# Altium PCB Rackmount_DSP.PcbDoc (part 9 of 24)
Units mil, origin at the board's own origin, x right, y up, seen from the top; angles counter-clockwise.
Board outline 10629.92 x 8267.72 mil, 4 copper layers (Top Layer, Mid Layer 1, Mid Layer 2, Bottom Layer), stack 36.2 mil thick; 4500 components, 1565 nets, 9765 pads, 3289 vias.
Unrouted connection lines stored in the file: 1.
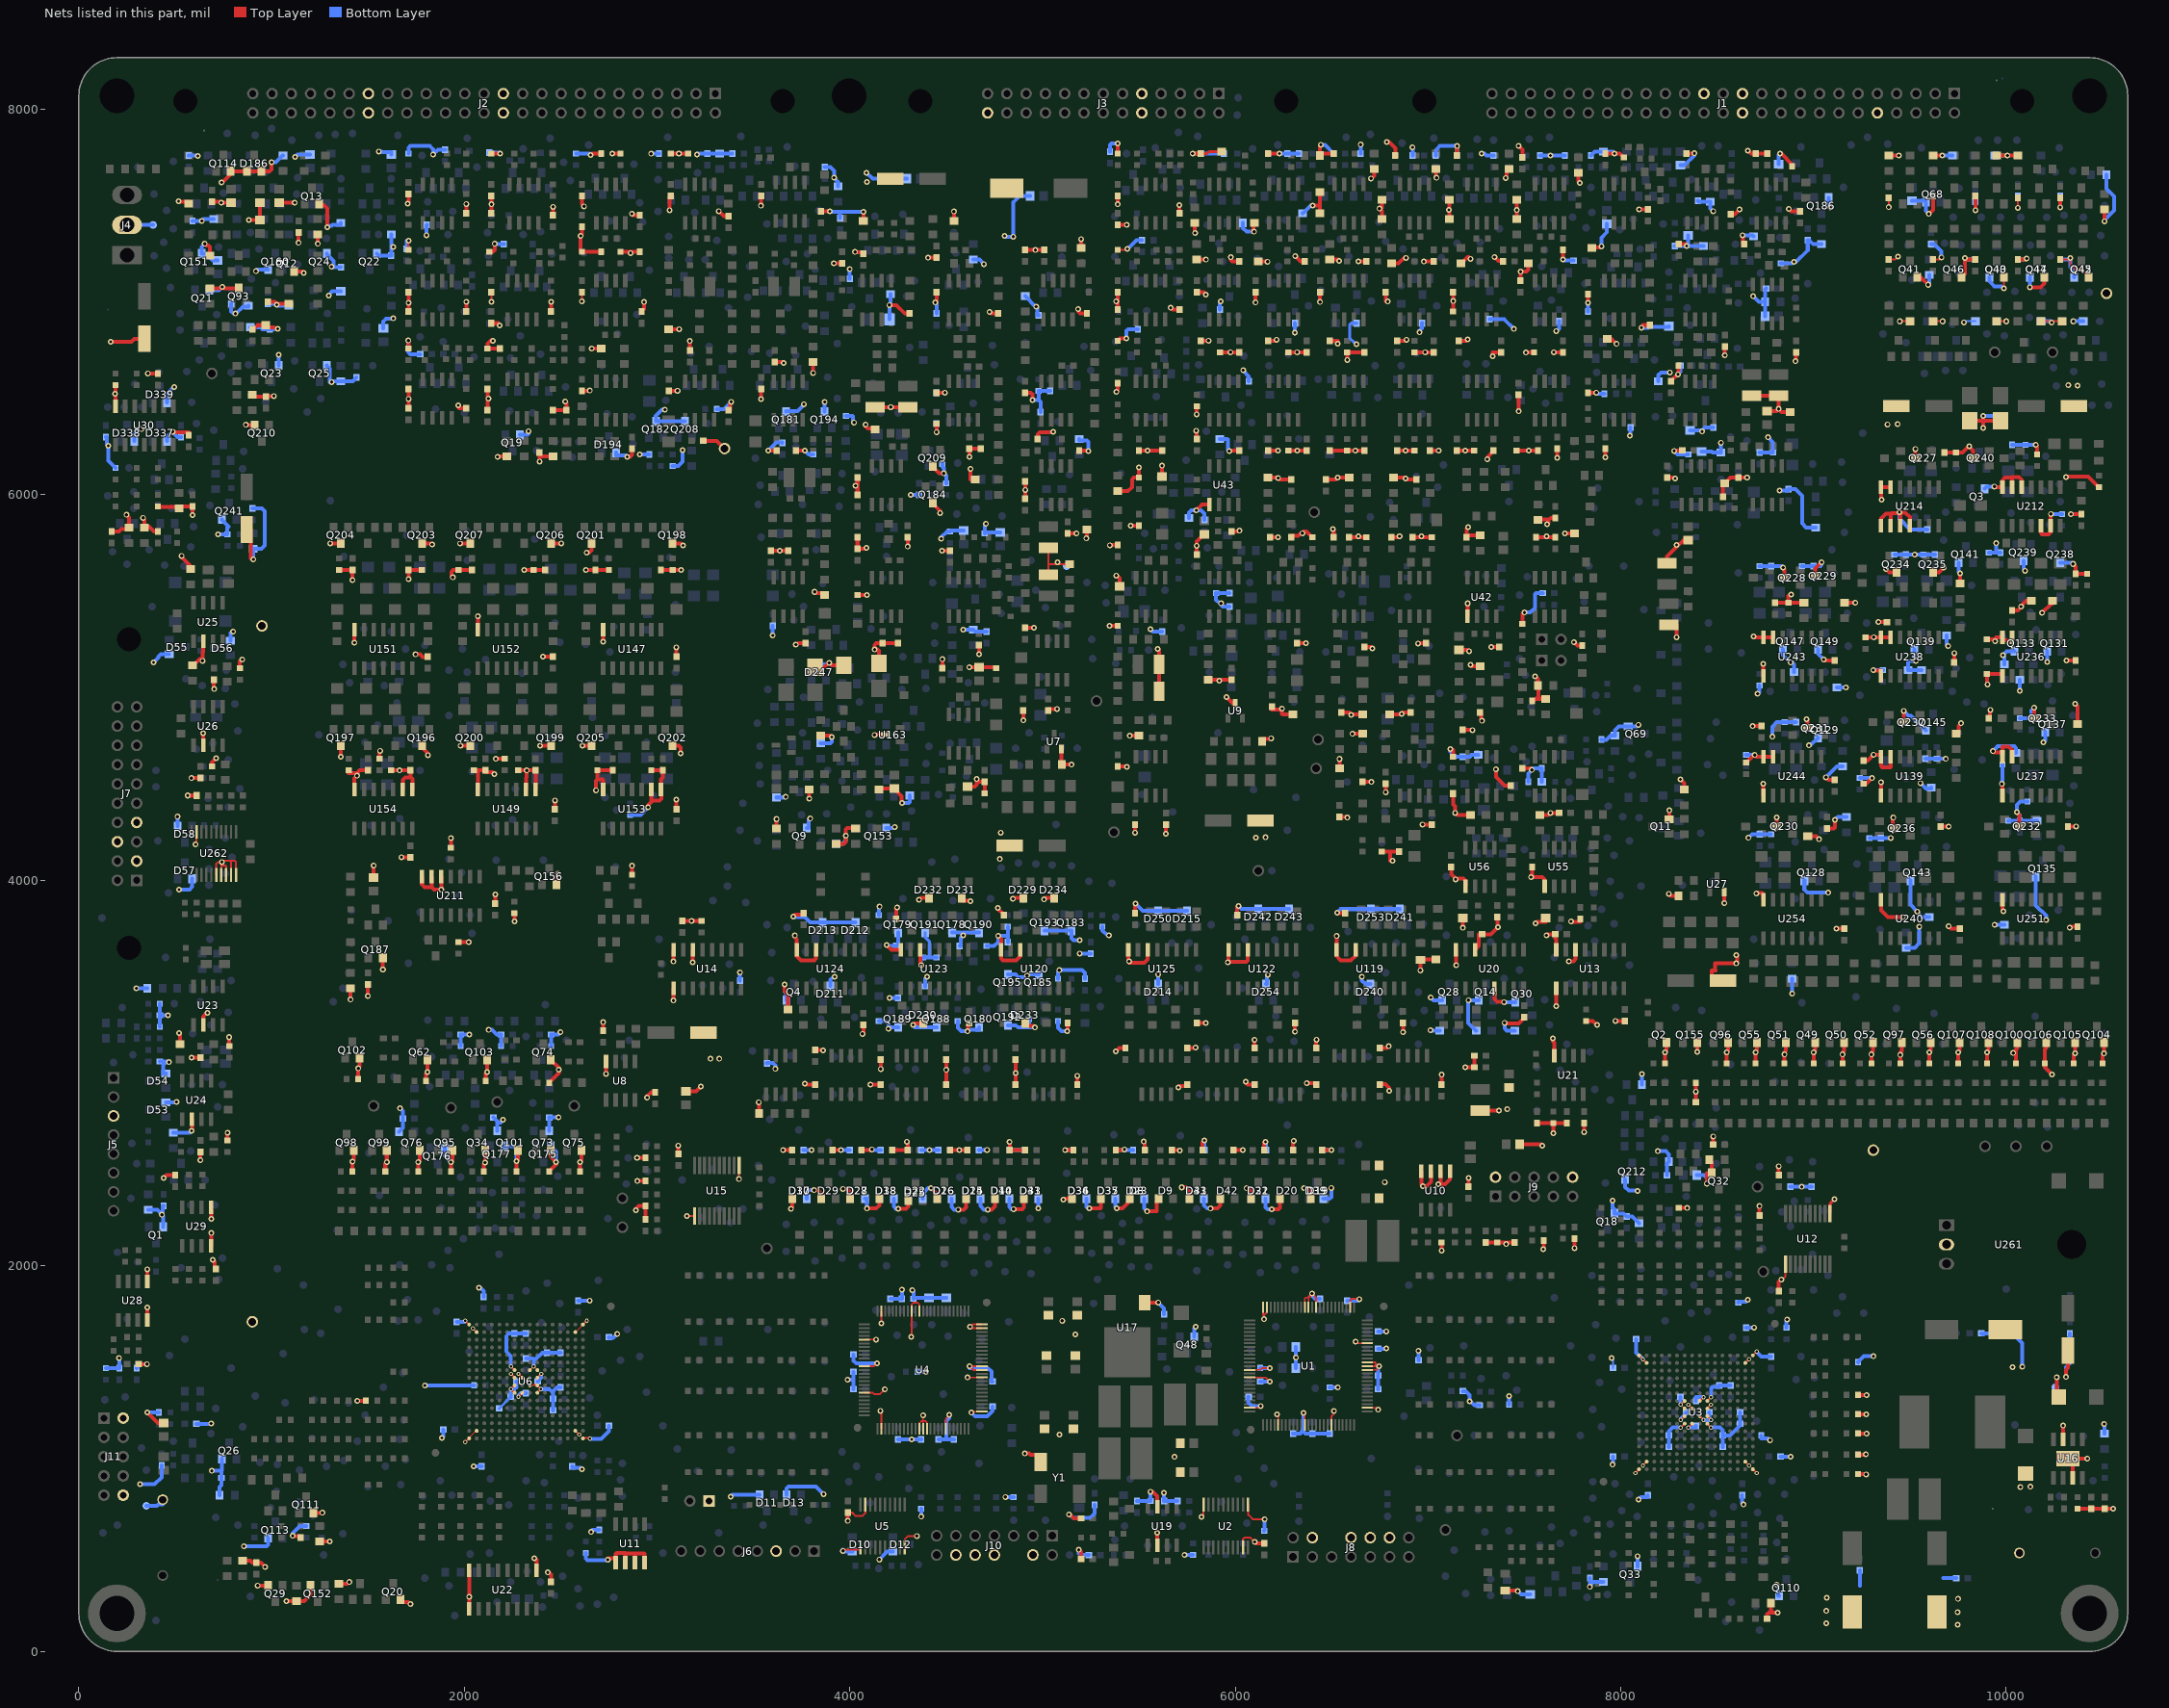
[diagram p11: the nets of this part, all layers, seen from the top]

## Via types
v1: diameter 30, hole 16, Top Layer to Bottom Layer, 3143 vias
v2: diameter 22, hole 12, Top Layer to Bottom Layer, 146 vias

## Nets (pads, with @x,y where several pads share a name; then routed paths per layer and width w, separated by ;. In a path a pad name is that pad's centre, name@x,y a point inside that pad or via, vN(x,y) a via of type N, cw(c..) or ccw(c..) an arc to the next point about the centre after c; other vN are vias at no path point) (continued)
GND: (continued)
  Top Layer w20: v1(164.54,6793.63) 272.37,6793.63 288.5,6809.76 C942.2@340,6809.76 ; C426.2@170,5810 207.55,5810 221.11,5823.56 251.06,5823.56 257.5,5830 R1487.1@260,5830 260,5882.86 v1(246.46,5896.4) ; U30.7@190,6460 190,6521.02 v1(187.09,6523.93) 190,6526.84 R1494.2@190,6570 ; C517.2@310,1490 v1(353.36,1490) ; v1(333.49,5880.9) 333.49,5876.51 340,5870 R1486.1@340,5834.56 ; R1486.1@340,5830 R1486.1@340,5834.56 ; v1(354.46,1982.26) 355,1981.71 U28.5@355,1920 ; U28.4@355,1720 v1(355,1783.67) ; v1(355.17,1240) 410.17,1185 C334.2@440,1185 ; v1(358.5,6630) C434.2@410,6630 ; C425.2@410,5810 390.57,5810 366,5834.56 R1486.1@340,5834.56 ; R1492.2@410,5940 410,5936.62 520,5936.62 R1485.1@520,5930 530,5940 C424.2@590,5940 v1(590,5894.64) ; v1(440.4,2456.37) 454.04,2470 C282.2@500,2470 ; v1(486.91,6328.02) 486.91,6324.8 570,6324.8 C290.2@570,6310 ; v1(517.66,7523.8) 521.47,7520 570,7520 R2225.1@570,7510 ; v1(520,3208.03) 525,3203.03 R2717.2@525,3150 ; v1(533.13,5683.32) 533.13,5677.09 580,5630.22 R2718.2@580,5615 ; v1(565.53,4440) C242.2@610,4440 ; v1(583.9,4530) C224.2@630,4530 ; v1(584.26,3080) C1175.1@630,3080 ; v1(584.64,2699.94) 584.64,2703.02 586.63,2705 U24.2@586.63,2760 ; R2716.2@590,5115 592.5,5115 626.64,5149.14 631.06,5149.14 v1(641.38,5138.82) 641.38,5181.38 645,5185 U25.2@645,5240 ; C1174.2@630,2590 630,2552.39 630.89,2551.5 v1(630.89,2547.47) ; U23.2@645,3250 645,3293.49 662.86,3311.35 667.36,3311.35 v1(667.36,3312.08) ; U26.2@645,4700 v1(645,4763.29) ; v1(652.97,7302.55) 661.26,7294.26 672.55,7294.26 680,7286.81 R1643.2@680,7240 ; R1100.1@680,7070 734.69,7070 v1(743.76,7079.07) 751.33,7071.5 Q93.3@830,7071.5 ; U29.4@686.63,2104.11 v1(686.63,2169.95) ; v1(686.63,2242.8) U29.5@686.63,2304.11 ; R2723.2@690,4590 690,4611.62 v1(712.42,4634.03) ; C1031.2@690,7520 733.5,7520 v1(738.5,7515) C825.2@790,7515 ; v1(694.99,2031.58) 704.96,2021.61 704.96,1984.11 C518.2@711.63,1984.11 ; C241.2@700,5040 700,4992.21 v1(701.78,4992.21) ; v1(740.44,7620.7) 745.28,7620.7 787.5,7662.92 Q114.2@787.5,7678.5 D186.1@872.5,7678.5 D186.2@947.5,7678.5 989.6,7678.5 1000.21,7689.11 v1(1000.21,7724.96) ; R2721.2@770,2650 770,2689.35 v1(770.94,2690.3) ; R2722.2@780,3140 v1(780,3186.26) ; R2724.2@835,5100 835,5135 845.84,5145.84 v1(847.95,5145.84) ; R1359.1@850,470 889.48,470 899.48,460 C377.1@920,460 943.94,460 v1(965.71,438.23) ; v1(865.79,6363.32) 863.98,6361.5 Q210.2@912.5,6361.5 ; C1111.2@870,5819.76 891.74,5819.76 891.74,5669.33 900.98,5669.33 v1(905.6,5664.72) ; v1(881.97,7425) C824.2@940,7425 C816.2@940,7515 ; R2651.2@900,6520 910,6510 C1158.1@970,6510 970,6510.7 1006,6510.7 1007.74,6512.44 v1(1011.36,6512.44) ; C1157.2@900,6860 907.5,6860 927.5,6880 R2652.1@970,6880 970,6870 1012.5,6870 1021.83,6860.67 v1(1031.15,6860.67) ; v1(927.67,341.5) Q29.2@982.5,341.5 ; C416.1@980,7000 1016,7000 1026.22,6989.78 v1(1026.22,6986.4) 1029.82,6990 R1372.1@1090,6990 ; C823.2@1040,7515 v1(1120.12,7515) ; v1(1076.15,260) R2222.1@1130,260 1169.07,260 1202.5,293.43 Q152.2@1202.5,341.5 ; v1(1108.88,599.32) 1110.7,597.5 1150,597.5 C896.2@1150,590 ; Q12.2@1117.5,7158.5 1160.24,7158.5 v1(1167.2,7151.53) ; v1(1140,7307.27) C417.1@1140,7360 ; Q111.2@1217.5,718.5 1262.55,718.5 v1(1263.17,719.12) ; v1(1240,7302.34) R1373.1@1240,7350 ; Q13.2@1247.5,7508.5 1247.5,7503.36 1271.55,7503.36 1288.76,7486.15 v1(1288.76,7387.58) ; R2037.2@1250,570 v1(1301,570) ; v1(1304.71,5748.5) Q204.3@1360,5748.5 ; R1279.2@1350,350 1392.5,350 1401.78,359.28 v1(1402.72,359.28) ; R2529.2@1350,5610 C1129.1@1420,5610 v1(1420,5558.32) ; v1(1359,4640.86) 1360,4641.86 Q197.3@1360,4698.5 ; R2535.2@1400,4570 1400,4556.28 v1@1443.07,4556.28 ; v1(1410,3381.56) R2554.2@1410,3440 ; R1969.1@1420,2490 v1(1420,2541.21) 1427.5,2548.71 Q98.2@1427.5,2598.5 ; U154.7@1430,4470 1430,4529.36 v1(1443.07,4542.42) v1@1443.07,4556.28 ; v1(1430,5232.84) U151.7@1430,5300 ; v1(1445.09,1300) R2522.1@1490,1300 ; R1968.1@1450,2970 v1(1450,3024.35) 1457.5,3031.85 Q102.2@1457.5,3078.5 ; v1(1500,3399.99) C1119.1@1500,3460 ; C1121.1@1500,4570 1456.79,4570 v1@1443.07,4556.28 ; C1137.2@1530,4015 v1(1530,4077.32) ; R2646.2@1560,4630 1560,4669 v1(1562.82,4671.82) ; v1(1577.5,3536.96) Q187.2@1577.5,3598.5 ; R1967.1@1590,2490 1590,2530.74 v1(1597.66,2538.41) 1597.5,2538.57 Q99.2@1597.5,2598.5 ; R2536.2@1620,4570 v1(1663.22,4570) C1122.1@1720,4570 1720,4532.5 ; Q20.2@1667.5,268.5 1667.5,255 1707.5,255 1716.29,246.21 v1(1719.96,246.21) ; v1(1673.36,4120) C1015.2@1720,4120 ; U154.2@1680,4470 1680,4520.06 1692.44,4532.5 1720,4532.5 ; v1(1705.63,7511.08) 1710,7515.44 C992.2@1710,7560 ; v1(1709.47,6800.28) 1710,6799.75 R816.2@1710,6760 ; v1(1710,5562.46) C1128.1@1710,5610 R2528.2@1780,5610 ; C365.1@1710,6450 v1(1710,6497.65) C606.2@1710,6550 ; C366.1@1710,6950 v1(1710,6995.48) C557.2@1710,7050 ; U154.1@1730,4470 1730,4525 1722.5,4532.5 1720,4532.5 ; v1(1747.19,5172.03) 1770.28,5172.03 1784.3,5158.01 1810,5158.01 C1012.2@1810,5160 ; R654.1@1760,2490 v1(1760,2537.71) 1767.5,2545.21 Q76.2@1767.5,2598.5 ; U211.7@1780,4020 1779.8,4020 1779.8,3978.95 1793.75,3965 1830,3965 ; Q196.3@1780,4698.5 1780,4688.3 1810.79,4657.51 v1(1810.79,4649.59) ; Q203.3@1780,5748.5 1826.03,5748.5 v1(1832.75,5741.78) ; R650.1@1800,2960 1800,2996.67 v1(1807.91,3004.58) 1807.5,3004.98 Q62.2@1807.5,3068.5 ; U211.6@1830,4020 1830,3965 ; U211.5@1880,4020 v1(1880,3952.01) 1844.49,3952.01 1831.5,3965 1830,3965 ; R1966.1@1930,2490 v1(1930,2538.41) 1937.5,2545.91 Q95.2@1937.5,2598.5 ; R2510.2@1930,4170 v1(1930,4218.45) ; v1(1939.88,5571.66) 1933.16,5571.66 1933.16,5601.26 1941.89,5610 R2532.2@1970,5610 C1132.1@2040,5610 ; v1(1968.48,6464.83) 1968.48,6455.52 1974,6450 C940.2@2010,6450 ; R2355.2@1970,3680 v1(2022.27,3680) ; v1(1977.43,5748.5) Q207.3@2030,5748.5 ; v1(1980.04,4698.5) Q200.3@2030,4698.5 ; C741.2@2010,6950 v1(2010,7000.97) ; C733.2@2010,7460 v1(2010,7508.92) ; U22.9@2025,220 v1(2025,282.57) U22.8@2025,420 ; R2525.2@2050,4570 C1125.1@2110,4570 C1125.1@2110,4569.93 ; U149.7@2070,4470 2070,4565.93 2074,4569.93 C1125.1@2110,4569.93 ; U152.7@2070,5300 v1(2070,5369.78) ; R653.1@2100,2490 2100,2528.44 v1(2107.17,2535.6) 2107.5,2535.94 Q34.2@2107.5,2598.5 ; R1964.1@2110,2960 2110,2997.98 v1(2117.5,3005.48) Q103.2@2117.5,3068.5 ; C371.1@2120,6440 2120,6494.85 v1(2124.56,6499.41) 2120,6503.97 C941.2@2120,6550 ; R845.2@2130,7260 2147.24,7260 2157.29,7270.05 v1(2157.29,7302.5) ; C372.1@2140,6890 2176,6890 2183.75,6882.25 v1(2183.75,6879.07) ; C373.1@2140,7460 v1(2140,7507.35) C974.2@2140,7550 ; R847.2@2140,7770 v1(2185,7770) ; v1(2147.95,6798.64) 2147.95,6801.07 2138.17,6801.07 2120,6782.9 R850.2@2120,6760 C1230.2@2185,6760 ; v1(2156.41,4550.68) 2146,4561.09 2110,4561.09 C1125.1@2110,4569.93 ; C1010.2@2160,3880 v1(2160,3926.24) ; v1(2162.65,4630) R2644.2@2210,4630 ; v1(2172.38,6197.39) 2168.83,6197.39 2171.82,6194.39 2177.43,6200 R1356.2@2220,6200 ; v1(2260,3786.27) R2356.2@2260,3830 ; R1965.1@2270,2490 v1(2270,2542.61) 2277.5,2550.11 Q101.2@2277.5,2598.5 ; R2524.2@2280,4570 v1(2324.2,4570) ; v1(2309.85,5610) R2531.2@2360,5610 C1131.1@2420,5610 ; U149.2@2320,4470 2320,4530.8 2324.2,4535 v1(2324.2,4570) ; v1(2363.4,483.38) 2366.62,483.38 2375,475 U22.1@2375,420 ; U149.1@2370,4470 C1124.1@2370,4570 v1(2324.2,4570) ; v1(2390,6173) 2390,6198.9 ; C357.1@2390,6220 2390,6198.9 ; v1(2392.39,4698.5) Q199.3@2450,4698.5 ; v1(2407.74,5160) C583.2@2460,5160 ; v1(2432.34,409.35) 2438.16,409.35 2450,397.5 C299.2@2450,360 ; R638.1@2440,2490 2474.9,2524.9 v1(2474.9,2538.58) 2447.5,2565.98 Q73.2@2447.5,2598.5 ; R651.1@2440,2950 2489.44,2999.44 v1(2489.44,3017) 2489.44,3026.56 Q74.2@2447.5,3068.5 ; Q206.3@2450,5748.5 v1(2503.09,5748.5) ; C558.2@2450,6950 v1(2450,7001.02) ; R1459.1@2460,6200 2391.1,6200 2390,6198.9 ; C556.2@2460,6440 C512.2@2530,6440 2530,6478.67 v1(2523.94,6484.72) ; C996.2@2460,7450 v1(2460,7494.09) ; C1112.2@2470,4370 v1(2470,4414.69) ; Q156.2@2477.5,3978.5 2477.5,4024.6 v1(2486.02,4033.12) ; R652.1@2600,2490 v1(2600,2537.71) 2607.5,2545.21 Q75.2@2607.5,2598.5 ; C561.2@2610,6540 2650.52,6540 v1(2651.17,6540.65) ; C369.1@2610,7390 2610,7348.79 v1(2603.8,7342.6) 2603.8,7260 R2341.2@2610,7260 C370.1@2710,7260 ; C744.2@2610,7550 2610,7507.81 v1(2620.98,7496.83) ; v1(2612.34,4698.5) Q205.3@2660,4698.5 ; v1(2630.98,5610) C1126.1@2680,5610 R2526.2@2750,5610 ; v1(2634.36,5699.72) 2646.79,5699.72 2660,5712.93 Q201.3@2660,5748.5 ; v1(2655.35,7762.98) 2662.36,7770 C363.1@2710,7770 ; v1(2661.09,6758.86) 2662.23,6760 R1743.2@2710,6760 ; v1(2683.5,4467.14) 2683.5,4516.23 2690,4522.73 ; C528.2@2720,3220 v1(2720,3263.96) ; U153.7@2720,4470 2720,4519.26 2716.54,4522.73 2690,4522.73 ; v1(2720,5237.99) U147.7@2720,5300 ; v1(2735,2996.43) U8.4@2735,3060 ; v1(2744.28,474.88) 2744.28,482.21 U11.1@2785,482.21 ; v1(2767.45,7770) R2337.2@2810,7770 ; C1130.1@2770,4570 R2530.2@2690,4570 2690,4522.73 ; U11.1@2785,460 U11.1@2785,482.21 ; R2338.2@2810,7260 v1@2861.91,7260 ; U11.2@2835,460 2835,508.38 ; v1(2844.37,6197.02) 2858.77,6197.02 2869.64,6207.89 2869.64,6240 C560.2@2870,6240 ; v1(2861.91,7254.56) v1@2861.91,7260 ; v1(2868.97,7457.89) 2868.97,7455.03 2874,7450 C737.2@2910,7450 ; R1946.2@2870,4030 v1(2870,4075.76) ; U11.3@2885,460 2885,507.65 ; v1(2889.46,2288.15) 2889.46,2295.46 2904,2310 C348.2@2940,2310 C347.2@2940,2240 ; v1(2896.17,2560) C345.2@2940,2560 ; v1(2897.06,2440) C346.2@2940,2440 ; C364.1@2910,7260 v1@2861.91,7260 ; C979.2@2920,6950 2932.5,6962.5 v1(2932.5,7000.01) ; U11.4@2935,460 2935,506.13 2933.48,507.65 2885,507.65 ; v1(2948.53,2872.63) 2948.53,2879.4 2969.14,2900 C728.2@2990,2900 ; v1(2953.2,4379.22) 2953.2,4387.56 2954.2,4388.55 2954.2,4391.62 2970,4407.42 2970,4413.31 ; U153.2@2970,4470 2970,4413.31 ; R2527.2@2970,4570 C1127.1@3030,4570 3030,4533.65 3020,4523.65 U153.1@3020,4470 3021.77,4470 3021.77,4423.24 3011.84,4413.31 2970,4413.31 ; C1123.1@3020,5610 R2523.2@3080,5610 v1(3124.37,5610) ; C976.2@3060,6540 v1(3105.97,6540) ; R1633.2@3060,6860 v1(3114.53,6860) ; v1(3064.35,7476.62) 3064.35,7550 C740.2@3070,7550 ; R2339.2@3070,7770 v1(3113.45,7770) R2336.2@3160,7770 ; Q202.3@3080,4698.5 3113.19,4698.5 3122.82,4688.87 v1(3122.82,4658.99) ; Q198.3@3080,5748.5 3122.9,5748.5 v1(3134.51,5736.89) ; v1(3085,3376.19) U14.9@3085,3440 ; v1(3085,3578.69) U14.8@3085,3640 ; C876.2@3100,4370 v1(3100,4419.13) ; C571.2@3100,5160 v1(3100,5208.72) ; C1082.2@3110,2580 v1(3110,2623.89) ; C305.2@3130,3790 v1(3178.75,3790) R858.1@3230,3790 ; C907.2@3150,2905 3201.86,2905 v1(3226.62,2929.76) ; C526.2@3170,6750 v1(3170,6797.76) ; v1(3185,3575.22) U14.6@3185,3640 ; C356.1@3240,6280 3310,6280 TP9.1@3350,6240 ; v1(3320.58,7471.67) 3347.25,7445 C975.2@3370,7445 ; C735.2@3370,6440 3378.57,6440 3378.57,6477.5 3383.97,6482.9 v1(3384.78,6482.9) ; v1(3527.66,2848.7) 3530,2846.36 R2509.1@3530,2790 ; v1(3538.27,7499.85) 3540,7501.58 C978.2@3540,7550 ; v1(3540,6497.3) C988.2@3540,6550 ; v1(3576.97,6230) C355.1@3620,6230 ; C747.2@3590,5710 v1(3637.38,5710) C542.2@3680,5710 ; C524.2@3610,6690 3650.52,6690 v1(3656.36,6684.17) ; R2507.1@3620,4270 v1(3620,4317.6) ; v1(3653.12,2600) C314.2@3700,2600 ; v1(3661.87,3460.26) 3661.87,3425.26 3680,3407.13 R1668.2@3680,3330 ; v1(3695,2295.93) 3702.5,2303.43 D30.1@3702.5,2348.5 ; v1(3706.5,3811.4) 3717.6,3822.5 3760,3822.5 C649.2@3760,3830 ; v1(3715.31,3713.72) 3715.31,3704.69 3725,3695 U124.8@3725,3640 3725,3607.66 3747.66,3585 3816.1,3585 3825,3593.9 U124.6@3825,3640 ; C967.2@3720,6230 v1(3766.09,6230) ; v1(3720.17,5222.5) 3726.5,5222.5 3734,5230 C1006.2@3770,5230 ; v1(3766.2,2945.38) 3771.58,2940 C645.2@3820,2940 ; v1(3790,4423.49) R1457.2@3790,4470 ; v1(3810,6632.56) R1631.2@3810,6690 ; v1(3815.09,2392.39) 3834.71,2392.39 3852.5,2374.6 D29.1@3852.5,2348.5 ; v1(3817.33,5496.41) 3823.74,5490 3870,5490 R1628.2@3870,5480 ; C642.2@3820,3120 3858.68,3120 v1(3861.07,3117.62) ; C917.1@3820,5105 3820,5098.17 3858.66,5098.17 3888.78,5128.29 v1(3892.89,5128.29) 3906.18,5115 C956.1@3970,5115 ; R1836.2@3850,4750 3899.99,4750 v1(3906.47,4743.52) ; C989.2@3850,7470 v1(3896.68,7470) ; C315.2@3910,2600 v1(3953.87,2600) ; v1(3917.57,7201.58) 3919.16,7200 C1052.2@3960,7200 ; R1290.2@3930,4190 3969.73,4190 3979.68,4199.95 v1(3979.68,4230.89) 3979.68,4263.91 3986.7,4270.93 4029.07,4270.93 R2220.1@4030,4270 ; v1(3964.89,2399.35) 3989.92,2399.35 4002.5,2386.76 D28.1@4002.5,2348.5 ; v1(3990,676.77) C246.2@3990,720 ; v1(4027.06,7260.06) 4029.62,7257.5 4070,7257.5 C736.2@4070,7250 ; v1(4029.93,6047.03) v1@4030.47,6047.03 ; R2374.1@4040,5480 v1(4088.19,5480) ; C1056.1@4040,5780 C1023.2@4040,5720 4081.38,5720 v1(4086.19,5724.81) ; C538.2@4040,6000 4040,6037.5 v1@4030.47,6047.03 ; C615.2@4040,6090 4040,6052.5 4034.53,6047.03 v1@4030.47,6047.03 ; C316.2@4060,2600 4110.53,2600 v1(4114.44,2603.91) ; v1(4065.41,3203.39) 4070,3207.98 C641.2@4070,3250 ; R1670.2@4070,7420 v1(4070,7467.71) ; v1(4082.28,6364.8) 4082.28,6355.24 4093.63,6343.89 4128.18,6343.89 4128.18,6340 R1099.1@4130,6340 ; v1(4089.05,2297.53) 4136.53,2297.53 4152.5,2313.5 D18.1@4152.5,2348.5 ; v1(4107.18,2940) C630.2@4160,2940 ; v1(4127.73,4754.17) 4128.55,4755 U163.3@4182.51,4755 ; C770.1@4130,6455 v1(4212.33,6455) C765.1@4300,6455 ; R962.1@4150,4470 4155,4475 C829.1@4230,4475 4269.37,4435.63 4269.37,4400.63 v1(4271.2,4400.63) ; R2089.2@4150,5125 4150,5190 4142.85,5197.15 v1(4128.51,5197.15) 4128.51,5221.47 4137.05,5230 C1055.1@4170,5230 C578.2@4250,5230 ; v1(4160,3021) C1036.2@4160,3070 ; v1(4191,3664.61) 4215.61,3640 U123.8@4265,3640 ; v1(4205,6984.82) 4242.05,6984.82 4286.87,6940 C987.2@4310,6940 ; C318.2@4220,2600 C323.1@4300,2600 4300,2640.31 v1(4296.11,2644.2) ; C644.2@4240,3800 4240,3852.81 4238.21,3854.6 4243.62,3860 4243.62,3859.4 v1(4244.87,3859.4) ; v1(4251.13,2296.07) 4289.89,2296.07 4302.5,2308.68 D25.1@4302.5,2338.5 ; v1(4300,5731.21) C614.2@4300,5780 ; v1(4328.14,3249.92) 4336.72,3258.5 D230.3@4380,3258.5 ; v1(4359.33,3899.93) 4361.43,3899.93 4370,3908.5 D232.3@4410,3908.5 ; U123.6@4365,3640 4365.62,3640 4365.62,3559.97 v1(4370.05,3559.97) ; v1(4405.91,7230) C1044.1@4450,7230 ; v1(4421.44,2403.75) 4419.95,2402.25 4452.5,2369.7 D16.1@4452.5,2348.5 ; Q184.3@4430,5958.5 4430,5955 4469.01,5915.99 v1(4469.01,5905.9) ; Q209.3@4430,6148.5 4430,6145 4464.14,6110.86 4487.15,6110.86 v1(4487.31,6111.02) ; v1(4442.78,6997.53) 4450,7004.75 C1032.2@4450,7050 ; v1(4450,6325.48) R2376.1@4450,6370 ; C980.2@4450,6530 v1(4492.83,6530) ; v1(4478.45,5710) C613.2@4520,5710 ; C1038.2@4480,5100 v1(4480,5147.14) ; C1021.2@4500,2940 v1(4500,3016.63) C1039.2@4500,3070 ; C322.1@4520,2600 v1(4567.51,2600) C320.1@4610,2600 ; R2305.1@4540,7420 v1(4540,7469.43) ; v1(4562.45,2292.04) 4590.84,2292.04 4602.5,2303.7 D24.1@4602.5,2348.5 ; D231.3@4580,3908.5 4580,3895 4622.35,3895 v1(4625.93,3891.42) ; C808.2@4610,4485 4648.15,4485 4658.51,4495.37 v1@4658.51,4515.49 ; v1(4610.23,3216.7) 4614,3220.46 4614,3260 C619.2@4620,3260 ; v1(4619.45,5105) C811.2@4670,5105 4753.25,5105 4758.25,5100 R1776.2@4760,5100 ; v1(4620,6197.47) C510.2@4620,6240 C1016.2@4680,6240 ; v1(4621.66,1479.63) v1@4626.66,1474.63 ; v1(4626.86,6134.69) 4626.86,6080 R1695.1@4650,6080 ; v1(4658.51,4525.04) v1@4658.51,4515.49 ; v1(4670,5173.15) C877.2@4670,5220 ; R1779.2@4700,4450 C970.2@4700,4510 4664,4510 v1@4658.51,4515.49 ; v1(4715.55,2292.04) 4735.01,2292.04 4752.5,2309.52 D14.1@4752.5,2348.5 ; v1(4724.35,6949.01) 4733.36,6940 C1022.2@4770,6940 ; v1(4768.69,3857.55) 4769.17,3857.07 4769.17,3852.33 4800,3821.5 C304.2@4800,3820 ; v1(4769.6,3711.63) 4769.6,3710.47 4785,3695.07 U120.8@4785,3640 4785,3593.44 4793.44,3585 4862.4,3585 4885,3607.6 U120.6@4885,3640 ; v1(4829.18,2643.29) 4830,2642.47 C326.1@4830,2600 C327.1@4910,2600 ; v1(4846.38,3903.77) 4851.1,3908.5 D229.3@4900,3908.5 ; v1(4849.6,2294.6) 4894.8,2294.6 4902.5,2302.3 D41.1@4902.5,2348.5 ; C1080.2@4860,2940 v1(4860,2999.75) C984.2@4860,3070 ; v1(4900,4829.68) C537.2@4900,4880 ; v1(4907.63,1026.2) 4931.3,1026.2 4937.5,1020 4990,1020 Y1.2@4990,982.5 ; D233.3@4910,3258.5 4910,3245 4950,3245 4958.5,3236.5 v1(4960.48,3236.5) ; C618.2@4910,5310 v1(4955.83,5310) ; C1059.1@4910,5980 v1(4910,6025.54) C1034.2@4910,6070 ; C695.2@4910,6530 4938.74,6530 4947.76,6520.98 v1(4947.76,6492.24) ; C1033.2@4910,7270 v1(4963.44,7270) C1045.1@5010,7270 ; C1046.1@4975,6290 4975,6314.43 4985.95,6325.38 5054.71,6325.38 v1(5054.71,6327.56) ; v1(5008.07,3900.57) 5016,3908.5 D234.3@5060,3908.5 ; C605.2@5030,4880 5030,4887.5 5067.31,4887.5 5068.98,4889.17 v1(5074.63,4889.17) ; U7.2@5097.4,4679.92 5098.1,4679.22 5098.1,4603.73 5100,4601.83 R1244.1@5100,4601.64 ; R1244.1@5100,4600 R1244.1@5100,4601.64 ; v1(5107.47,2343.95) 5112.01,2348.5 D36.1@5152.5,2348.5 ; v1(5116.53,2600) C3.2@5160,2600 ; v1(5128.33,3217.18) 5128.33,3214.59 5130,3212.92 C636.2@5130,3260 ; C1081.2@5130,5800 v1(5176.26,5800) ; v1(5136.5,710.5) 5141.46,710.5 5161.96,690 C508.2@5200,690 ; v1(5149.68,4600) 5149.68,4601.64 R1244.1@5100,4601.64 ; C573.2@5180,2940 v1(5180,2986) ; v1(5183.9,6962.96) 5186.5,6960.36 5186.5,6947.5 5194,6940 C1017.2@5230,6940 ; v1(5188.22,526.73) 5189.27,526.73 5200,516 C515.2@5200,480 ; C692.2@5190,6230 5229.49,6230 5232.65,6226.85 v1(5237.5,6226.85) ; R2304.1@5200,7280 v1(5200,7326.96) ; v1(5226.59,5773.74) 5230,5777.14 R2311.1@5230,5820 ; v1(5242.89,2298.11) 5299.59,2298.11 5302.5,2301.02 D37.1@5302.5,2348.5 ; v1(5346.73,5320.17) 5346.91,5320 R1777.2@5390,5320 ; v1(5349,5738.41) 5352.41,5738.41 5354,5740 C1041.2@5390,5740 ; v1(5379.85,3113.32) 5381.93,3113.32 5398.61,3130 C1009.2@5430,3130 ; C6.2@5380,2600 5421.38,2600 v1(5425.29,2603.91) ; v1(5381.39,7003.65) v1@5390,7003.65 ; v1(5382.58,5581.16) 5386.34,5581.16 5400,5567.5 C806.2@5400,5525 ; v1(5383.45,6533.71) 5390,6540.27 C1026.2@5390,6580 ; v1(5385.54,2298.3) 5414.02,2298.3 5452.5,2336.77 D23.1@5452.5,2348.5 ; C611.2@5390,4590 5435.52,4590 v1(5437.05,4588.48) ; R1694.1@5390,6020 5443.24,6020 5464,6040.76 5464,6080.64 5473.36,6090 R1774.2@5500,6090 v1(5500,6141.36) ; R810.2@5390,6800 5400.96,6810.96 v1(5434.13,6810.96) ; C428.1@5390,6960 v1@5390,7003.65 ; C997.2@5390,7050 v1@5390,7003.65 ; C427.1@5390,7400 v1(5436.31,7400) ; v1(5390,7507) C734.2@5390,7550 ; R802.2@5390,7770 v1(5390,7822.52) ; U125.8@5445,3640 5445,3585 5448.68,3581.32 v1(5448.68,3579.69) 5448.68,3572.32 5526.85,3572.32 5545,3590.47 U125.6@5545,3640 ; v1(5452.43,4750) R1097.1@5500,4750 ; v1(5456.87,5840) C509.2@5500,5840 ; C647.2@5480,3830 5480,3878.62 v1(5481.6,3878.62) ; v1(5480,4247.27) C536.2@5480,4290 ; C361.1@5500,6230 v1(5545.25,6230) C568.2@5620,6230 ; v1(5525.28,2644.57) 5530,2639.84 C8.2@5530,2600 ; U17.1@5530,1810.1 v1(5600.67,1810.1) ; v1(5542.67,2282.55) 5593.01,2282.55 5593.16,2282.7 5593.16,2335.66 5602.5,2345 D9.1@5602.5,2348.5 ; v1(5560,828.2) 5571.8,828.2 5595,805 U19.3@5595,750 ; U19.6@5595,550 v1(5595,614.94) ; v1(5597.69,5200.36) 5605,5193.06 C763.1@5605,5120 C768.1@5605,4980 ; C809.2@5620,6095 v1(5620,6150.98) ; v1(5640,4242.07) C610.2@5640,4290 ; v1(5664.07,6970.19) 5664.07,6969.93 5674,6960 C983.2@5710,6960 ; C7.2@5670,2600 5710.12,2600 v1(5711.34,2598.78) ; v1(5704.44,2925.48) 5711.46,2932.5 5750,2932.5 C635.2@5750,2940 ; C731.2@5710,7460 v1(5710,7503.23) ; v1(5722.13,2407.07) 5743.59,2407.07 5762.5,2388.17 D43.1@5762.5,2348.5 ; C629.2@5750,3130 5793.6,3130 v1(5793.6,3132.3) ; v1@5778.66,7770 C639.2@5820,7770 ; R2606.2@5790,7410 5790,7357.92 v1(5791,7357.92) ; v1(5797.45,6332.77) 5800,6330.23 C584.2@5800,6290 ; v1(5798.13,5920) 5828.14,5950 U43.5@5865,5950 ; C627.2@5800,3260 v1(5846.73,3260) ; C1005.2@5800,5690 v1(5800,5736.14) 5800,5757.5 5837.5,5795 R2087.1@5840,5795 ; v1(5800,6417.91) R2043.2@5800,6460 ; C745.2@5800,7050 5836,7050 5847.2,7038.8 v1(5847.2,7038.56) ; R2335.2@5800,7220 v1(5848.01,7220) ; C678.2@5820,6800 v1(5861,6800) ; C1079.1@5830,2600 5830,2640.43 v1(5840,2650.43) ; R1678.1@5860,5040 5911.95,5040 v1(5916.95,5035) 5921.95,5040 C790.2@5980,5040 ; v1(5870.84,2297.2) 5906.6,2297.2 5922.5,2313.1 D42.1@5922.5,2348.5 ; R2397.2@5920,6740 v1(5975.24,6740) C637.2@6020,6740 ; v1(5953.86,4951.43) 5986.62,4918.66 U9.3@6000,4918.66 ; v1(5960.89,3574.53) 5960.89,3576.05 v1@5962.41,3576.05 ; U122.8@5965,3640 5965,3578.64 v1@5962.41,3576.05 ; v1(5968.46,6226.68) 5971.78,6230 C971.2@6020,6230 ; v1(5976.09,7232.55) 5976.09,7217.91 5984,7210 C576.2@6020,7210 ; C585.2@5980,5810 6017.92,5810 v1(6021.58,5813.66) ; C1078.1@5990,2600 v1(6039.87,2600) ; C624.2@6010,3820 6010,3859.19 v1(6017.06,3866.24) ; v1(6054.74,2954.62) 6054.74,2949.26 6064,2940 C658.2@6100,2940 ; v1(6058.02,2402.31) 6072.19,2402.31 6082.5,2392 D21.1@6082.5,2348.5 ; U122.6@6065,3640 6065,3585 6056.05,3576.05 v1@5962.41,3576.05 ; v1@6095.93,571.99 v1(6100.7,567.22) 6107.92,560 C303.2@6150,560 ; v1(6097.61,7364.69) 6089.66,7364.69 6094.97,7370 6094.97,7410 R2607.2@6100,7410 ; C1037.2@6100,3130 v1(6100,3172.84) ; v1(6105.08,6997.44) C661.2@6105.08,7050 ; R2334.2@6120,7210 6167,7210 v1(6167.52,7209.48) ; R1242.1@6140,4720 6140,4732.5 6181.51,4732.5 v1(6185.8,4736.78) ; C14.1@6150,2600 6150,2637.51 v1(6155.94,2643.45) ; R1682.1@6170,6090 6219.98,6090 v1(6222.55,6087.43) 6229.98,6080 C794.2@6290,6080 ; C1066.2@6170,6230 v1(6221.44,6230) ; C659.2@6170,6800 6210.03,6800 v1(6214.7,6804.67) ; C657.2@6170,7770 6218.22,7770 6221.11,7767.11 6226.06,7767.11 v1(6228.95,7770) ; C675.2@6180,5780 v1(6222.06,5780) ; v1(6188.77,2293.17) 6223.88,2293.17 6232.5,2301.79 D20.1@6232.5,2348.5 ; C795.2@6190,4900 6190,4885 6241.44,4885 v1@6242.61,4883.83 ; v1(6242.61,4891.43) v1@6242.61,4883.83 ; R2042.2@6274.92,6230 v1(6322.01,6230) C886.2@6370,6230 ; R2396.2@6274.92,6740 v1(6320.69,6740) C622.2@6370,6740 ; C529.2@6290,5780 6290,5787.5 6326,5787.5 6339.38,5800.88 v1(6347.78,5800.88) 6356.04,5809.14 6369.86,5809.14 6399,5780 R2293.2@6400,5780 ; C13.1@6300,2600 6300,2644.9 v1(6302.96,2647.86) ; R1683.1@6300,4860 6246.44,4860 6242.61,4863.83 v1@6242.61,4883.83 ; v1(6310,3215.59) C626.1@6310,3260 ; v1(6310.66,7238.28) 6338.95,7210 C973.2@6360,7210 ; C1002.2@6320,5230 v1(6366.31,5230) ; v1(6356.15,2403.41) 6372.84,2403.41 6392.5,2383.75 D19.1@6392.5,2348.5 ; v1(6370.41,2947.88) 6380.6,2947.88 6380.98,2947.5 6420,2947.5 C621.2@6420,2940 ; v1(6401.53,7500) 6440,7500 ; C743.2@6420,3130 6420,3172.41 v1(6420.93,3173.34) ; v1(6440,7000.28) C640.2@6440,7050 ; R2608.2@6440,7460 6440,7500 ; R2596.2@6440,7570 6440,7500 ; v1(6443.78,7816.13) 6440,7812.35 R2331.2@6440,7760 6450,7770 C623.2@6510,7770 ; C1075.1@6450,2600 v1(6498.79,2600) ; C803.2@6470,6080 6521.34,6080 v1(6531.34,6090) R1677.1@6590,6090 ; C1065.2@6490,6230 R2041.2@6580,6230 v1(6622.56,6230) C612.2@6670,6230 ; C999.2@6490,6800 6531.07,6800 v1(6531.07,6783.18) ; R2333.2@6490,7220 6532.5,7220 6539,7213.5 v1(6539,7212.82) ; v1(6506.65,5822.81) 6510,5819.46 C1001.2@6510,5780 ; v1(6525,3710.8) U119.8@6525,3640 6525,3607.4 6547.4,3585 6599.68,3585 6625,3610.32 U119.6@6625,3640 ; v1(6528.21,3832.43) 6530.65,3830 C625.2@6570,3830 ; C796.2@6540,4330 6576.57,4330 v1(6581.02,4325.55) ; R1685.1@6540,4580 v1(6540,4629.79) ; C802.2@6550,4870 6590.7,4870 v1(6601.73,4858.97) 6602.77,4860 R1676.1@6660,4860 ; v1(6580.65,6699.88) 6580,6700.53 R2407.2@6580,6740 C981.2@6670,6740 ; C547.2@6590,5780 v1@6638.6,5780 ; v1(6607.5,4760) R1684.1@6660,4760 ; v1(6638.3,7211.55) 6651.98,7211.55 6653.53,7210 C750.2@6680,7210 ; v1(6638.6,5784.66) v1@6638.6,5780 ; C797.2@6660,4510 v1(6705.8,4510) ; C681.2@6670,5210 6706,5210 6711.36,5204.64 v1(6711.36,5203.67) ; R2292.2@6680,5780 v1@6638.6,5780 ; v1(6704.61,7641.38) 6706.2,7641.38 6720,7655.18 R2330.2@6720,7690 ; v1(6747.5,7484.48) 6746.38,7484.48 6746.28,7484.38 v1@6751.28,7479.38 ; C654.2@6750,2940 6750,2942.59 6777.39,2942.59 6797.94,2922.04 v1(6797.94,2907.39) ; C990.2@6750,3130 6786.23,3130 v1(6795.53,3139.3) ; R2290.2@6760,4150 6802.27,4150 ; R2603.2@6760,7430 6760,7470.66 v1@6751.28,7479.38 ; R2594.2@6760,7530 6760,7488.1 v1@6751.28,7479.38 ; v1(6780,4457.08) C648.2@6780,4500 ; C1003.2@6780,7050 6780,7004.06 6781.32,7002.74 v1(6791.15,7002.74) ; v1(6785.59,7830) 6797.5,7830 6830,7797.5 C1025.2@6830,7760 ; R1674.1@6800,4860 6861.21,4860 v1(6864.04,4862.83) 6871.21,4870 C788.2@6910,4870 ; C972.2@6810,5780 6847.49,5780 v1(6852.15,5784.66) ; R2326.2@6810,7200 6845.73,7200 6879.87,7234.14 6880.83,7234.14 v1(6885.67,7229.31) ; v1(6816.48,4102.12) 6802.27,4102.12 6802.27,4150 ; R1675.1@6820,6090 6878.35,6090 v1(6883.35,6085) 6888.35,6080 C789.2@6940,6080 ; C1064.2@6840,6230 v1(6884.08,6230) R2409.2@6930,6230 ; C986.2@6840,6800 6884.3,6800 v1(6889,6804.7) ; C530.2@6850,4150 6802.27,4150 ; v1(6869.72,3212.1) 6870,3212.1 C620.2@6870,3260 ; C531.2@6920,5780 v1@6966.42,5780 ; R2406.2@6930,6740 v1(6985,6740) C937.2@7030,6740 ; v1(6947.78,5228.82) 6951.48,5228.82 6952.66,5230 C969.2@6990,5230 ; v1(6960,3533.03) D46.1@6960,3586.5 6963.5,3590 R1081.2@7040,3590 ; U10.4@6965,2490 6965,2421.6 v1(6972.86,2413.74) 6993.74,2413.74 7015,2435 U10.3@7015,2490 ; v1(6966.42,5784.66) v1@6966.42,5780 ; v1(6971.59,4290) C977.2@7020,4290 ; v1(6978.54,7210) C938.2@7030,7210 ; C566.2@7010,6230 v1(7054.55,6230) ; R2291.2@7020,5780 v1@6966.42,5780 ; R2327.2@7040,7690 7040,7648.37 v1(7044.01,7644.35) ; U10.2@7065,2490 7065,2435 v1(7053.26,2423.26) 7088.26,2423.26 7112.51,2447.51 7112.51,2490 U10.1@7115,2490 ; R753.2@7070,2120 7070,2080.75 v1(7071.09,2079.66) ; C656.2@7070,2940 v1(7070,2991.73) ; R2604.2@7110,7430 7110,7476.94 v1(7108.64,7478.29) 7110,7479.65 R2593.2@7110,7530 ; v1(7115.9,4681.54) 7123.46,4681.54 7130,4675 R2288.2@7130,4640 ; C885.2@7120,4070 7120,4032.5 v1@7142.99,4009.51 ; C549.2@7130,4450 7130,4394.71 7139.97,4384.74 7139.97,4351.32 v1(7141.32,4349.96) 7152.45,4338.83 7216.33,4338.83 7217.5,4340 R2552.2@7220,4340 ; R2405.2@7130,6950 v1(7130,7005.15) C1024.2@7130,7050 ; v1(7142.99,4005.22) v1@7142.99,4009.51 ; U20.8@7145,3640 7145,3585 7146.51,3583.49 v1(7146.51,3560) ; C1063.2@7150,6230 v1(7192.66,6230) R2399.2@7240,6230 ; C982.2@7150,7760 v1(7150,7809.11) ; C1053.1@7160,5195 7206.63,5195 v1(7212.62,5189.02) ; C634.2@7160,6800 7198.37,6800 v1(7204.94,6806.58) ; R2325.2@7170,7200 7172.5,7200 7206.64,7234.14 7210.19,7234.14 v1(7220,7224.34) ; v1(7180,3753.21) C1134.1@7180,3805 ; C676.2@7180,4780 7229.04,4780 v1(7229.79,4779.24) ; v1(7192.66,3030) C300.2@7240,3030 C301.2@7240,3090 ; U56.5@7195,3970 7195,3996.33 7182.67,4008.66 7143.84,4008.66 v1@7142.99,4009.51 ; U42.5@7205,5370 v1(7205,5436.46) ; v1(7207.63,5832.78) 7200,5825.14 C608.2@7200,5780 7210,5790 R1475.2@7270,5790 ; C292.2@7210,2410 v1(7210,2455.12) ; v1(7220.18,5117.5) 7220.18,5114.43 7224.61,5110 R1680.1@7270,5110 ; U20.6@7245,3640 7263.5,3658.5 7263.5,3683.28 7264.22,3684 7264.22,3720 C646.2@7280,3720 7326.16,3720 v1(7362.38,3756.22) 7360,3758.61 C1011.2@7360,3810 ; C771.2@7270,2805 v1(7368.09,2805) ; C792.2@7270,4870 7276,4870 7276,4832.5 7279.38,4829.12 v1(7279.38,4827.46) ; C359.2@7300,2120 R862.2@7360,2120 7398.45,2120 v1(7405.85,2112.59) 7413.26,2120 C440.2@7450,2120 ; v1(7306.9,6183.88) 7306.9,6195.4 7340,6228.5 C607.2@7340,6230 ; v1(7328.3,5210.68) 7328.99,5210 C609.2@7370,5210 ; v1(7335.34,6719.06) 7335.34,6740 C1018.2@7380,6740 ; v1(7344.39,7233.67) 7365.72,7212.35 7390,7212.35 C985.2@7390,7210 ; U20.13@7345,3440 7345,3384.41 7359.12,3370.3 7394.12,3370.3 v1(7394.12,3368.5) ; v1(7351.85,4576.36) 7351.85,4536.67 7398.52,4490 C1027.2@7430,4490 ; v1(7396.9,3260.85) 7399.39,3258.36 7469.86,3258.36 7500,3288.5 C1030.2@7500,3290 ; D44.1@7400,316.5 7460.88,316.5 v1(7465.24,312.14) ; v1(7403.13,7644) 7407.5,7648.36 7407.5,7690 R2328.2@7420,7690 ; R2398.2@7460,6230 v1(7523.38,6230) C1062.2@7570,6230 ; R2605.2@7460,7430 v1(7460,7477.39) R2592.2@7460,7530 ; v1(7469.34,7810.17) 7490,7789.51 C928.2@7490,7750 ; v1(7470,6433.34) C707.2@7470,6520 ; C335.2@7475,2630 7586.49,2630 v1(7592.79,2623.7) ; C671.2@7480,7110 v1(7480,7157.61) 7510.18,7157.61 7520,7167.43 R2324.2@7520,7200 ; C1029.2@7490,4580 7530.94,4580 v1(7538.49,4572.45) ; R2342.2@7490,5330 7490,5382.01 7500,5392.01 v1(7500,5389.34) ; v1(7507.83,6737.97) 7509.86,6740 R2404.2@7550,6740 ; C1113.2@7540,4070 7540,4031.81 7534.21,4026.02 v1(7534.21,4016.69) 7592.9,4016.69 7603.3,4006.29 7603.3,3970 U55.5@7605,3970 ; C540.1@7540,4930 7546.66,4930 7560,4943.34 ; v1(7555.13,5058.45) 7555.13,5060.01 7555.44,5060.32 7570,5045.76 R2383.2@7570,5010 7572.05,5010 7572.05,4943.34 ; v1(7557.76,3777.49) 7557.76,3777.99 7565,3785.23 7610,3785.23 C1133.1@7610,3805 ; C632.2@7560,5780 v1@7614.98,5780 ; C311.2@7565,2740 R1320.1@7650,2740 ; R1612.1@7570,5870 7570,5871.27 7627.56,5871.27 ; R2551.2@7580,4340 7622.5,4340 7632.5,4350 v1(7634.53,4350) C617.2@7680,4350 ; v1(7597.24,2086.57) 7600,2089.33 C351.2@7600,2130 ; v1(7614.2,3715.17) 7619.03,3720 C965.2@7660,3720 7660,3700.42 7665,3695.42 U13.8@7665,3640 ; v1(7614.98,5784.66) v1@7614.98,5780 ; v1(7617.91,5847.02) 7624,5853.11 7624,5867.72 7627.56,5871.27 ; v1(7647.69,3180) 7647.69,3165.88 7655,3158.57 U21.4@7655,3090 ; v1(7650,2688.11) R1320.1@7650,2740 ; v1(7652.8,6740) C991.2@7700,6740 ; C543.1@7660,5780 v1@7614.98,5780 ; C544.1@7660,5880 7660,5881.01 7637.29,5881.01 7627.56,5871.27 ; v1(7665,3347.41) U13.9@7665,3440 ; v1(7670,6192.03) C704.2@7670,6240 ; v1(7700,7220.35) C746.2@7700,7270 ; v1(7710.22,5800) R1611.1@7760,5800 ; C310.2@7720,2740 R1320.1@7650,2740 ; v1(7730.76,3580) 7753.82,3580 7765,3591.18 U13.6@7765,3640 ; v1(7741.58,3787.36) 7745.65,3783.28 7790,3783.28 C883.2@7790,3800 ; v1(7756.41,5235) 7759.23,5235 7775.51,5218.72 7800,5218.72 C572.2@7800,5217 ; v1(7760,2092.28) C352.2@7760,2140 ; R2329.2@7780,7670 7780,7624.66 v1(7786.84,7617.83) ; v1(7810,2694.07) C1004.2@7810,2740 ; R859.1@7820,3270 7856,3270 7876,3250 v1(7877.45,3250) ; C677.2@7830,6530 v1(7873.44,6530) ; v1(7830,6995.46) C666.2@7830,7040 ; R1988.2@7850,7280 7850,7282.53 7892.5,7282.53 v1(7899.41,7289.44) ; v1(7920,6194.4) C376.1@7920,6240 ; C664.2@7920,7770 v1(7966.6,7770) 7995,7770 R1607.2@8015,7750 ; R1990.2@7930,6810 7951.03,6810 v1(7978.01,6783.01) ; v1(7973,3270.84) 7972.15,3270 C289.2@8020,3270 ; v1(8095.47,7480) C929.2@8140,7480 ; v1(8107.74,6867.37) 8107.74,6873.74 8114,6880 C662.2@8150,6880 ; R643.1@8230,3050 v1(8230,3107.5) 8237.5,3115 Q2.2@8237.5,3158.5 ; C761.1@8240,5645 8240,5678.79 v1@8289.96,5728.75 ; C604.2@8240,6090 8276.22,6090 v1(8282.06,6084.16) ; v1(8248.79,3930.12) 8258.91,3920 R2092.1@8300,3920 ; C766.1@8250,5325 8290,5325 8290,5262.25 v1(8289.38,5261.63) ; Q11.2@8251.5,4317.5 v1(8251.5,4362.95) ; C663.2@8260,6590 8260,6591.5 8293.5,6625 v1(8297.05,6625) 8300,6627.95 R1605.2@8300,6670 ; v1(8277.18,6227.91) 8279.27,6230 C402.2@8320,6230 ; v1(8289.96,5739.19) v1@8289.96,5728.75 ; R707.2@8300,2300 v1(8343.95,2300) ; C665.2@8300,7300 8336,7300 8342.85,7293.15 8342.85,7291.57 v1(8342.5,7291.57) ; v1(8309.14,4523.52) 8330,4502.66 R1448.2@8330,4470 ; C738.2@8340,7770 8381.17,7770 v1(8381.17,7771.82) ; C798.2@8350,5765 8326.21,5765 v1@8289.96,5728.75 ; C1084.1@8390,2850 v1(8390,2903.99) R2408.1@8390,2950 ; v1(8397.5,3109.55) Q155.2@8397.5,3158.5 ; v1(8445.63,2426.87) 8445.63,2481.5 Q32.2@8472.5,2481.5 8472.5,2537.5 R1370.2@8460,2550 ; C414.1@8480,2630 v1(8480,2671.34) ; C668.2@8530,5990 8529.48,5990 8529.48,6060 R2599.2@8540,6060 8570,6090 C1040.2@8610,6090 v1(8655.3,6090) ; C954.1@8530.24,3480 8506.33,3480 8471.24,3480 8471.24,3531.5 8492.92,3531.5 8489.88,3534.53 8489.88,3568.43 8598.64,3568.43 8598.98,3568.43 v1@8598.98,3568.77 ; U27.2@8537.4,3939.92 8537.4,3938.5 8537.4,3881.96 v1(8537.5,3881.96) ; v1(8540,6723.31) C672.2@8540,6770 ; R1956.1@8550,3050 v1(8550,3107.5) 8557.5,3115 Q96.2@8557.5,3158.5 ; C748.2@8570,7455 8590.78,7455 v1(8615.78,7480) ; v1(8598.64,3568.77) v1@8598.98,3568.77 ; v1(8598.64,3612.24) 8598.98,3612.24 8599.59,3612.24 8603.34,3608.48 8603.34,3568.77 v1@8598.98,3568.77 ; v1(8632.14,7346.91) 8628.62,7346.91 8628.62,7344.64 8634,7339.26 8634,7300 C1115.2@8640,7300 ; R1826.1@8650,4610 8651,4610 8691,4650 v1(8695.09,4650) 8705.09,4640 U244.7@8740,4640 U244.6@8790,4640 ; v1(8658.52,7785.34) 8661.89,7785.34 8677.23,7770 C881.2@8700,7770 C535.2@8760,7770 ; C762.1@8680,6515 C767.1@8820,6515 8820,6446.01 v1(8819.52,6445.53) ; v1(8684.75,4800) C945.2@8730,4800 ; v1(8688.67,5265.46) 8694.14,5260 U243.7@8740,5260 U243.6@8790,5260 ; R644.1@8700,3050 v1(8700,3107.5) 8707.5,3115 Q55.2@8707.5,3158.5 ; v1(8703.19,3932.16) 8703.19,3933.89 8733.53,3933.89 8740,3927.42 U254.7@8740,3900 ; C344.2@8720,2260 v1(8720,2309.98) ; v1(8739.59,4500.76) 8740,4500.35 U244.8@8740,4440 ; v1(8739.62,5122.81) 8739.62,5115.38 8740,5115 U243.8@8740,5060 ; C897.2@8760,170 8760,194.02 8767.75,201.77 8792.25,201.77 ; C800.2@8760,6435 8808.99,6435 v1(8819.52,6445.53) ; R2038.2@8780,250 8780,214.02 8792.25,201.77 ; C993.2@8800,5440 R1828.1@8870,5440 ; Q230.3@8808.5,4280 v1(8808.5,4326.14) ; v1(8813.4,200.99) 8814.19,201.77 8792.25,201.77 ; C343.2@8820,1870 8820,1916.6 v1(8832.92,1929.51) v1@8833.47,1930.07 ; C1083.2@8820,2470 v1(8820,2516.76) ; v1(8827.1,7771.08) 8832.86,7771.08 8890,7713.94 R2734.2@8890,7705 ; v1(8842.42,5621.92) 8848.5,5615.84 Q228.3@8848.5,5570 ; R649.1@8850,3050 v1(8850,3096.59) 8850,3107.5 8857.5,3115 Q51.2@8857.5,3158.5 ; v1(8872.12,7482.77) 8884.89,7470 C880.2@8930,7470 ; R1687.1@8880,6430 8835.05,6430 v1(8819.52,6445.53) ; v1(8883.5,5483.3) 8878.3,5483.3 8870,5475 R1828.1@8870,5440 ; v1(8906.78,6692.72) 8910,6695.93 C667.2@8910,6740 ; R1415.2@8950,5440 R1828.1@8870,5440 ; v1(8963.63,4836.16) 8968.5,4831.29 Q231.3@8968.5,4790 ; R1416.2@8970,4230 9012.5,4230 9028.11,4214.39 v1(9028.11,4213.21) ; R645.1@9000,3050 v1(9000,3107.5) 9007.5,3115 Q49.2@9007.5,3158.5 ; Q229.3@9008.5,5580 9008.5,5617.76 9041.39,5650.65 v1(9042.33,5650.65) ; v1(9052.87,5145.43) 9058.31,5140 C574.2@9110,5140 ; v1(9064.48,4534.5) 9078.98,4520 C643.2@9110,4520 ; C1019.2@9070,4270 9106,4270 9111,4275 v1(9111,4314.11) ; v1(9118.85,3750) C994.2@9160,3750 ; R648.1@9150,3050 v1(9150,3096.59) 9150,3107.5 9157.5,3115 Q50.2@9157.5,3158.5 ; R2219.1@9160,5440 v1(9216.98,5440) ; R2103.2@9230,920 9270.42,920 v1(9272.28,918.14) ; R2100.2@9230,1020 9270.38,1020 v1(9271.96,1021.58) ; R2104.2@9230,1130 v1(9274.83,1130) ; R2101.2@9230,1230 v1(9272.92,1230) ; R2102.2@9230,1330 v1(9274.83,1330) ; R1834.1@9260,4500 9273.39,4500 v1(9303.39,4530) ; C882.2@9260,4620 9279.9,4620 v1(9311.8,4651.9) 9338.1,4651.9 U139.7@9350,4640 9350,4592.7 9355.73,4586.97 9397.53,4586.97 9400,4589.44 U139.6@9400,4640 ; R1838.1@9270,5260 9310.88,5260 v1(9312.26,5261.38) 9313.64,5260 U238.7@9350,5260 9350,5259.83 9400,5259.83 U238.6@9400,5260 ; R646.1@9300,3050 v1(9300,3096.59) 9300,3107.5 9307.5,3115 Q52.2@9307.5,3158.5 ; v1(9310.06,5090) 9310.06,5088.55 9350,5088.55 U238.8@9350,5060 ; v1(9336.83,5340) C669.2@9380,5340 ; U240.7@9350,3900 9350,3845 9385.58,3809.42 v1(9464.04,3809.42) ; U139.8@9350,4440 v1(9350,4508.14) ; U214.8@9350,5840 9350,5876.72 9376.01,5902.73 9400,5902.73 9400,5899.97 ; v1(9353.5,5974.59) 9350,5978.09 U214.7@9350,6040 U214.6@9400,6040 ; v1(9376.16,5615) 9392.66,5598.5 Q234.3@9430,5598.5 ; R1381.1@9390,7760 v1(9442.26,7760) ; U214.9@9400,5840 9400,5899.97 ; v1(9414.14,4325.51) 9414.14,4319.2 9409.93,4315 9409.93,4270 Q236.3@9418.5,4270 ; v1(9445.45,5909.44) v1@9450,5904.89 ; R1957.1@9450,3050 v1(9450,3094.09) 9450,3107.5 9457.5,3115 Q97.2@9457.5,3158.5 ; U214.10@9450,5840 v1@9450,5904.64 ; Q237.3@9468.5,4820 v1(9468.5,4879.21) ; U214.11@9500,5840 9500,5884.2 9476.88,5907.32 9450,5907.32 v1@9450,5904.89 ; Q227.3@9528.5,6190 9528.5,6236.97 v1(9529.2,6237.68) ; Q41.2@9537.5,7128.5 9555.85,7128.5 v1(9594.55,7089.79) ; v1(9598.21,7457) 9620,7478.79 C1106.2@9620,7550 ; R647.1@9600,3050 v1(9600,3107.5) 9607.5,3115 Q56.2@9607.5,3158.5 ; Q235.3@9620,5598.5 9650.6,5598.5 v1(9674.7,5622.61) ; R1386.1@9620,7760 v1(9668.28,7760) ; C590.2@9660,4280 9700.09,4280 v1(9701.31,4278.77) ; C1161.1@9680,6220 R2654.2@9740,6220 9771.79,6220 9804.29,6252.5 v1(9808.5,6252.5) 9808.5,6250 9828.5,6230 Q240.3@9828.5,6190 ; v1(9701.54,3761.92) 9713.46,3750 C1020.2@9760,3750 ; C998.2@9730,5130 v1(9730,5179.16) ; R2217.1@9740,4760 9752.5,4760 9752.5,4801.95 v1(9765.23,4814.68) ; R1961.1@9750,3050 v1(9750,3107.5) 9757.5,3115 Q107.2@9757.5,3158.5 ; R2215.1@9760,5540 v1(9760,5592.8) ; Q46.2@9767.5,7128.5 9785.75,7146.74 v1(9785.75,7228.45) 9794.19,7220 C404.1@9840,7220 ; C918.2@9810,6385 9880.25,6385 ; v1(9840,7476.56) C1110.2@9840,7550 ; v1(9880.25,6347.43) 9880.25,6385 ; v1(9880.82,6408.84) 9880.82,6408.27 9880.82,6385 ; R1960.1@9900,3050 v1(9900,3107.5) 9907.5,3115 Q108.2@9907.5,3158.5 ; R1829.1@9900,5250 9936,5250 v1@9942.5,5243.5 ; v1(9903.11,5016.49) 9900,5019.6 R1830.1@9900,5070 9970,5070 U236.8@9980,5060 ; C1013.2@9910,4840 9916,4840 9916,4882.36 v1(9917.92,4884.28) ; v1(9931.23,4670.01) 9938.12,4663.12 U237.7@9980,4663.12 ; v1(9938.61,6042.98) 9941.59,6040 U212.7@9980,6040 9980,6075.73 9992.7,6088.43 10030,6088.43 ; v1(9941.56,5239.8) 9942.5,5240.74 v1@9942.5,5243.5 ; R1380.1@9950,7760 v1(10006.3,7760) R1384.1@10060,7760 ; C955.2@9970,6385 9880.82,6385 ; v1(9976.64,4500.19) 9978.8,4500.19 9980,4500.19 U237.8@9980,4440 ; U251.7@9980,3900 9980,3844.43 v1(9985.3,3839.13) ; U237.7@9980,4640 U237.7@9980,4663.12 ; U237.6@10030,4640 10030,4676.57 10012.49,4694.08 9980.29,4694.08 9980,4693.79 U237.7@9980,4663.12 ; U236.6@10030,5260 10030,5246.14 9980,5246.14 U236.7@9980,5260 9948.5,5260 9942.5,5254 v1@9942.5,5243.5 ; C1114.2@10030,5400 10059.56,5400 10076.68,5417.12 v1(10076.68,5420) 10076.68,5424.37 10102.31,5450 R2276.2@10130,5450 ; U212.6@10030,6040 10030,6088.43 ; v1(10035.97,3104.27) 10046.77,3104.27 v1@10050,3107.5 ; R1958.1@10050,3050 v1@10050,3107.5 ; v1(10055.51,4353.52) 10068.5,4340.53 Q232.3@10068.5,4280 ; Q100.2@10057.5,3158.5 10057.5,3130.76 10050,3123.26 v1@10050,3107.5 ; C408.1@10060,7220 10099.86,7220 v1(10105.96,7226.11) ; U212.5@10080,6040 10080,6078.31 10065.3,6093.01 10030,6093.01 10030,6088.43 ; v1(10122.5,7077.27) 10123.95,7075.82 10178.25,7075.82 10197.5,7095.07 Q44.2@10197.5,7128.5 ; v1(10143.85,4895.39) 10143.85,4882.28 10146.13,4880 10146.13,4840 Q233.3@10148.5,4840 ; v1(10153.44,6260) 10160,6253.44 R2513.2@10160,6210 ; U212.12@10180,5840 10180,5801.12 10185.15,5795.97 10220.64,5795.97 10230,5805.33 U212.13@10230,5840 10230,5899.23 v1(10231.43,5900.65) ; v1(10186.13,5387.56) 10234.66,5436.1 10240,5436.1 R2210.1@10240,5450 ; Q106.2@10207.5,3158.5 10207.5,3130.71 10200,3123.21 R1959.1@10200,3050 10200,3030.89 v1(10237.6,2993.29) ; v1(10261.26,1421.9) 10262.62,1421.9 10262.62,1320 D3.2@10272.5,1320 ; v1(10280,7491.4) C1107.2@10280,7540 ; U16.7@10295,1100 v1(10295,1170.91) ; v1(10309.43,1423.57) 10309.43,1460.19 10320,1470.76 C916.2@10320,1559.76 ; v1(10310.26,6092.07) 10310.26,6094.43 10424.57,6094.43 10479,6040 R2078.2@10480,6040 ; v1(10311.98,5140) C679.2@10360,5140 ; C1007.2@10320,4280 v1(10362.28,4280) ; v1(10328.71,3753.83) 10328.71,3754.71 10334,3760 C1008.2@10370,3760 ; v1(10335.67,5899.3) 10336.37,5900 C939.2@10390,5900 ; U16.3@10345,900 10345,975 U16.9@10320,1000 v1(10420.59,1000) ; v1(10346.41,5641.27) 10360,5627.68 C1170.1@10360,5590 R2665.2@10420,5590 ; R1962.1@10350,3050 10350,3095.37 v1(10357.5,3102.87) Q105.2@10357.5,3158.5 ; v1(10357.09,4915.3) 10370,4902.39 R2213.1@10370,4810 ; R743.2@10370,740 C438.2@10440,740 C429.2@10510,740 10554.12,740 v1(10554.53,739.59) ; R1963.1@10500,3050 10500,3094.27 v1(10507.5,3101.77) Q104.2@10507.5,3158.5 ; v1(10510,7419.4) R1385.1@10510,7480 ; U11.1@2785,482.21 2785,504.22 2790.39,509.61 2835,509.61 2835,508.38 ; 2835,508.38 2885,508.38 2885,507.65 ; 7560,4943.34 7572.05,4943.34 ; 7560,4943.34 7560,4940 R1634.1@7610,4940 7606.66,4943.34 7572.05,4943.34 ; 9400,5899.97 9404.67,5904.64 v1@9450,5904.64 ; v1@9450,5904.64 v1@9450,5904.89 ; 9880.25,6385 9880.82,6385
  Bottom Layer w10: v1(5077.21,5649.7) 5086.91,5640 5115,5640 TP1726.1@5125,5630 ; v1(7952.19,1521.45) 7960,1513.64 C227.2@7960,1470 ; v1(9780.6,6894.97) 9785.62,6900 R1363.1@9840,6900 ; v1(9840,7476.56) C1109.2@9840,7520 ; v1(10060,7489.2) C1104.2@10060,7550
  Bottom Layer w15: C272.2@2180,1260 2180.41,1260 2240,1319.6 C279.2@2240,1320 ; v1(4370.05,3559.97) 4371.5,3561.42 4371.5,3600 R2587.2@4380,3600 4380,3603.42 4413.5,3603.42 4414.4,3604.32 4414.4,3681.43 4390,3705.83 Q191.3@4390,3728.5 ; v1(6627.96,6782.09) 6624.47,6782.09 6592.95,6813.6 6592.95,6881.89 6601.47,6890.4 6601.87,6890 C1071.2@6630,6890